# Altium PCB Sky_PCB_1.PcbDoc
Units mm, origin at the board's own origin, x right, y up, seen from the top; angles counter-clockwise.
Board outline 119.04 x 79.87 mm, 2 copper layers (Top Layer, Bottom Layer); 22 components, 19 nets, 98 pads, 0 vias.
Unrouted connection lines stored in the file: 2.
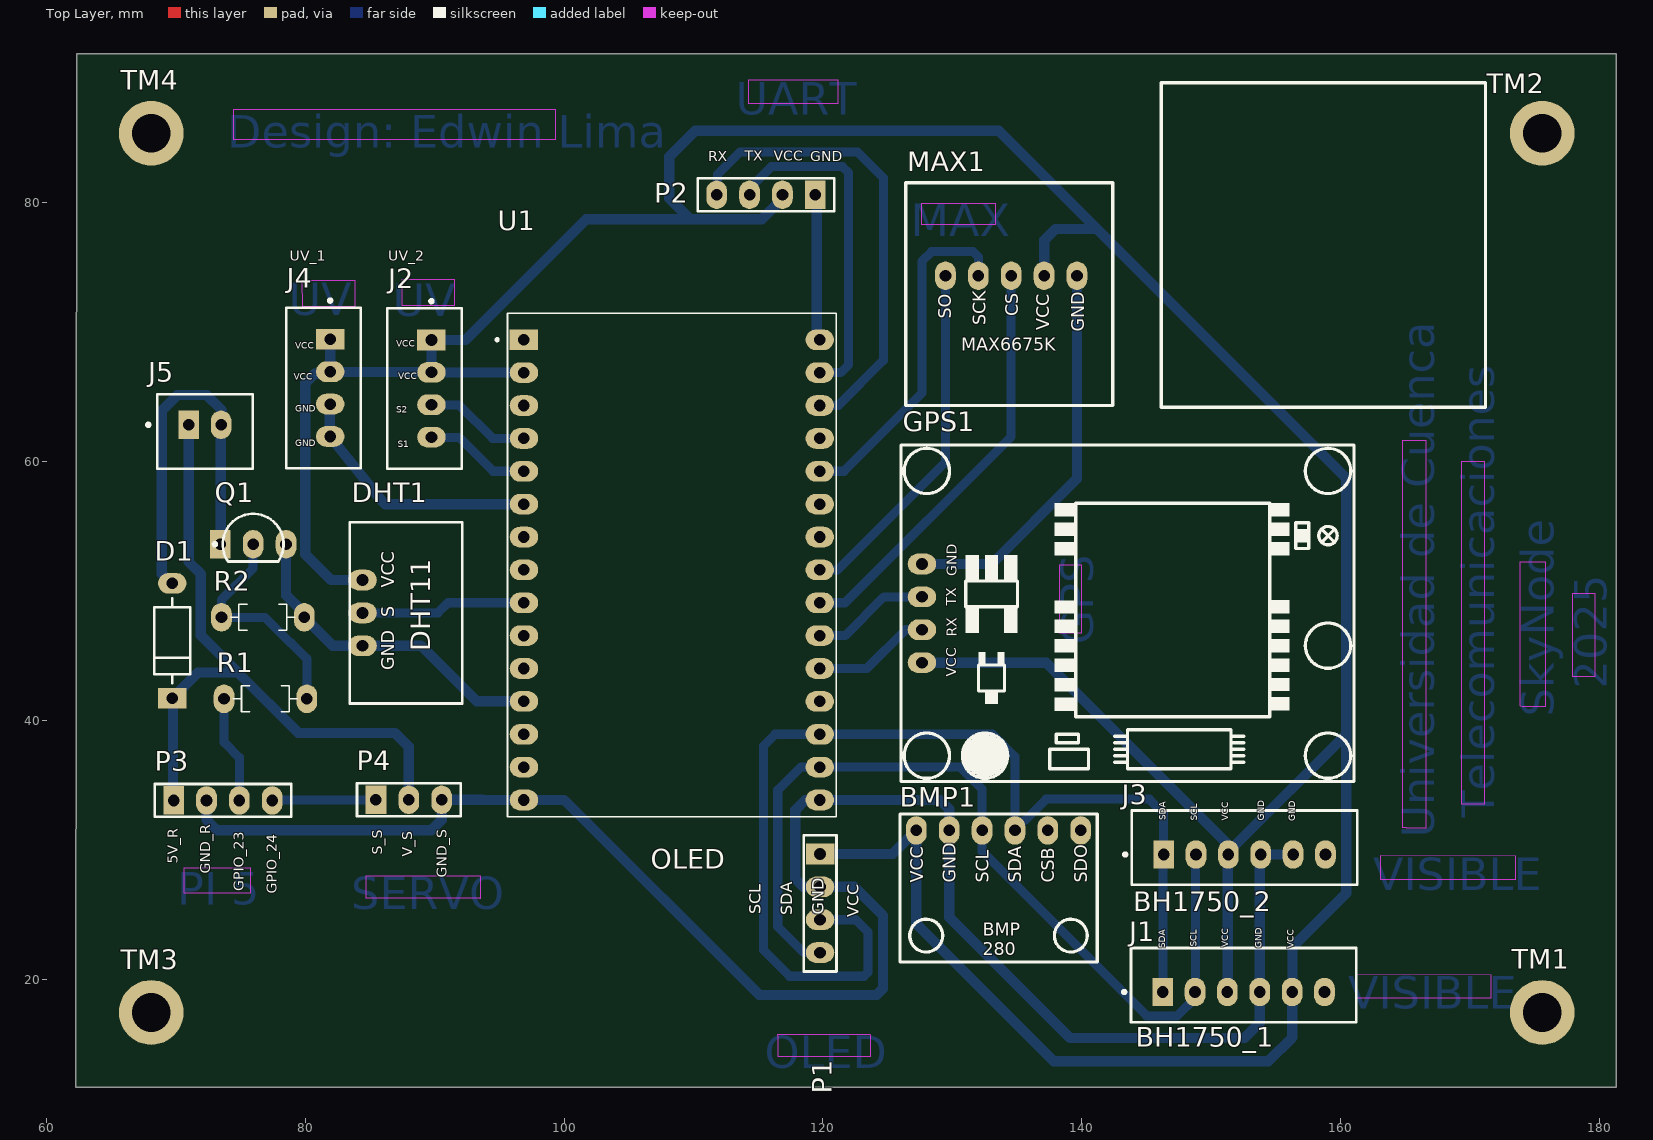
[diagram p0: Top Layer view]
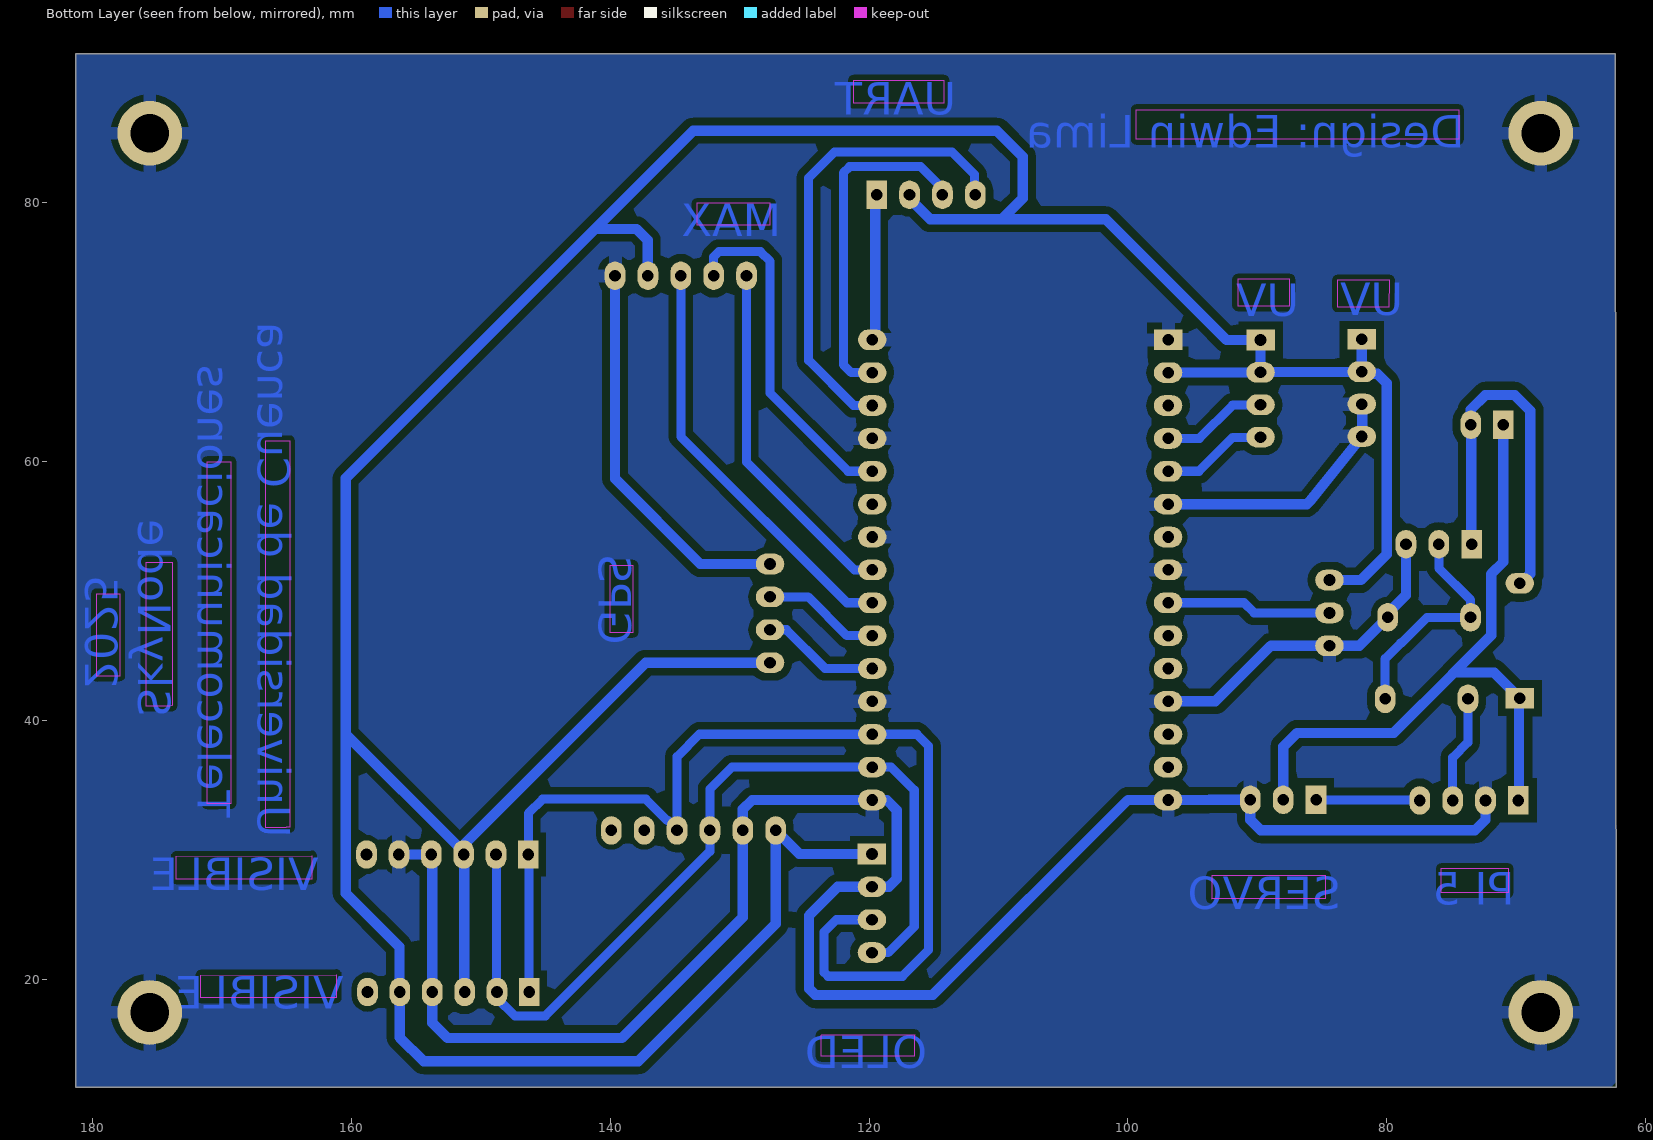
[diagram p1: Bottom Layer view, seen from below]
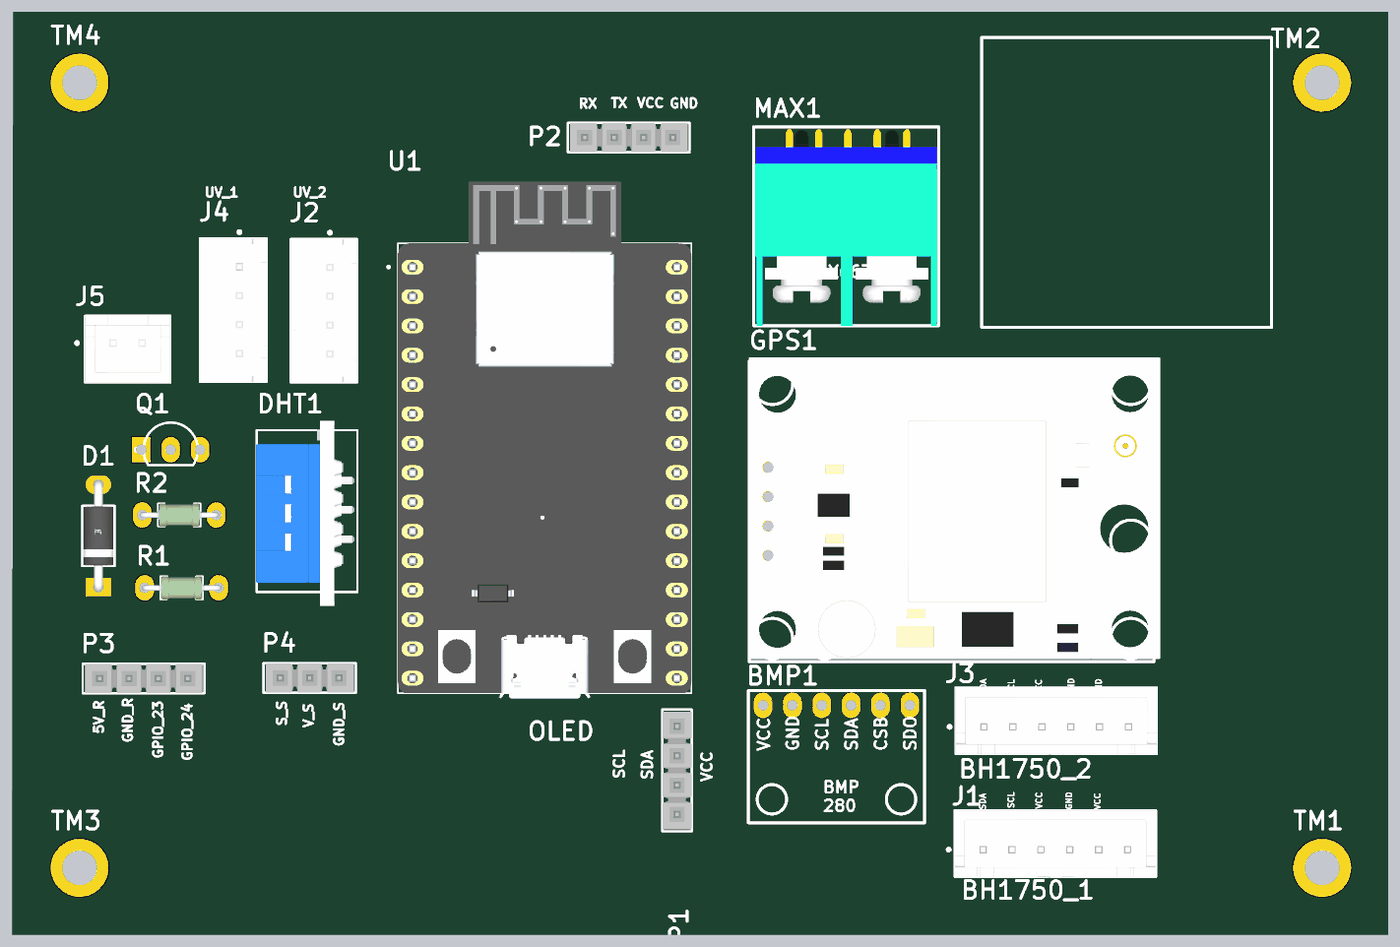
[diagram p2: 3D render of the assembled board from above, using the file's embedded part models]

## Layer stack, top to bottom
Top Solder: solder mask 0.0102, Solder Resist, Dk 3.5
Top Layer: signal copper 0.0356
Dielectric 1: dielectric 0.32, FR-4, Dk 4.8
Bottom Layer: signal copper 0.0356
Bottom Solder: solder mask 0.0102, Solder Resist, Dk 3.5

## Board outline
62.263,11.625 181.3,11.625 181.3,91.5 62.352,91.5

## Design rules (kind name [scope] priority, off if disabled: settings)
Clearance Clearance_1 [InNamedPolygon('PolygonSL') vs InNetClass('All Nets')] p1: gap=0.6 ignorepadtopadclearanceinfootprint=FALSE
Clearance [All] p2: gap=0.4 ignorepadtopadclearanceinfootprint=FALSE
Height [All] p1: minheight=0 maxheight=38.1 prefheight=12.7
PlaneClearance [All] p1: clearance=0.8
PlaneConnect [InNetClass('All Nets')] p1: planeconnectstyle=Relief reliefexpansion=0.5 reliefentries=4 reliefconductorwidth=0.8 reliefairgap=0.5
PolygonConnect [All] p1: connectstyle=Relief reliefconductorwidth=1 reliefentries=4 polygonreliefangle="90 Angle" airgapwidth=0.5
RoutingLayers [All] p1: top layer_v5=FALSE bottom layer_v5=TRUE
RoutingVias [All] p1: holewidth=0.711 width=1.27 viastyle="Through Hole" minholewidth=0.711 minwidth=1.27 maxholewidth=0.711 maxwidth=1.27
SolderMaskExpansion [All] p1: expansion=0.102 istentingtop=FALSE
SupplyNets "Schematic Supply Nets_1" [InNet('VCC')] p1: voltage=0.000
SupplyNets "Schematic Supply Nets" [InNet('GND')] p2: voltage=0.000
Width Width_1 [InNetClass('Signal')] p1: maxlimit=0.8 minlimit=0.7 preferedwidth=0.7
Width [InNetClass('POWER')] p2: maxlimit=1 minlimit=0.8 preferedwidth=0.8
26 further rules are at their usual default settings.

## Classes and differential pairs
net class Signal: 8511_1 8511_2 CS DHT GRX GTX NetP3_3 NetP3_4 NetQ1_2 RX SCK SCL SDA SO TX
net class POWER: GND VCC Ventilador+ Ventilador-
component class Externo: D1 J5 P3 P4 Q1 R1 R2
component class Sensores: BMP1 DHT1 GPS1 MAX1
component class Salida: J1 J2 J3 J4 P1 P2
component class Control: U1

## Components (designator, comment, footprint, x,y, rotation, side; value= is the part's Value field where it differs from the comment)
BMP1 "BMP280" BMP280 132.175,27.7 r90 top
D1 "1N4007" FP-1N4007-MFG 69.725,46.14 r90 top value=15pF
DHT1 "DHT11" DHT11 84.425,48.29 r90 top
GPS1 "GPS6MV2" GPS 127.061,47.033 r90 top
J1 "BH1750_1" FP-B6B-XH-A_LF_SN-MFG 152.5,19.525 r0 top
J2 "8511_1" FP-B4B-XH-A_LF_SN-MFG 89.225,65.625 r90 top
J3 "BH1750_2" FP-B6B-XH-A_LF_SN-MFG 152.575,30.15 r0 top
J4 "8511_2" FP-B4B-XH-A_LF_SN-MFG 81.4,65.675 r90 top
J5 "Ventilador" FP-B2B-XH-A_LF_SN-MFG 72.25,62.3 r0 top
MAX1 "MAX6675" MAX6675 134.1,73.825 r0 top
P1 "OLED" SMTC-TSW-104-08-X-S 119.775,29.665 r270 top
P2 "UART" SMTC-TSW-104-08-X-S 119.412,80.602 r180 top
P3 "Con_Rapberry" SMTC-TSW-104-08-X-S 69.83,33.8 r0 top
P4 "ServoMotor" SMTC-TSW-103-07-X-S 85.46,33.85 r0 top
Q1 "P2N2222AG" ONSC-TO-92-3-29-11 75.975,53.6 r0 top
R1 "1k" RESAD640W45L370D200 76.925,41.65 r0 top
R2 "10k" RESAD640W45L370D200 76.725,47.95 r180 top
TM1 "Tornillo" "Tornillo M3"#1 175.575,17.425 r0 top
TM2 "Tornillo" "Tornillo M3"#2 155.575,85.35 r0 top
TM3 "Tornillo" "Tornillo M3"#1 68.1,17.425 r0 top
TM4 "Tornillo" "Tornillo M3"#1 68.1,85.35 r0 top
U1 "ESP32-C3-DEVKITM-1" XCVR_ESP32-C3-DEVKITM-1 108.325,52 r0 top

## Footprints (in the part's own frame and the unit in brackets; to place one, negate y for a bottom-side part, rotate by r counter-clockwise, add the part's x,y. Pads: shape width x height; smd on the part's side, far side on the other; paste and mask are expansions set on the pad)
BMP280 [mm]
  oval 2.2x1.6 hole 0.9 paste-2539.97 mask+0.051: 1(3.787,4.959) 2(3.787,2.419) 3(3.787,-0.121) 4(3.787,-2.661) 5(3.787,-5.201) 6(3.787,-7.741)
  silkscreen extent -6.37,-9.01 5.06,6.23, body extent -6.3,-9 5.2,5.8, height 5.3
DHT11 [mm]
  oval 1.6x2.2 hole 0.9 paste-2539.97 mask+0: 1(-2.54,0) 2(0,0) 3(2.54,0)
  silkscreen extent -7,-7.7 7,1, body extent -8.2,-7.45 7.8,1.05, height 25.09
FP-1N4007-MFG [mm]
  rect 1.6x2.2 hole 0.9 paste-2539.97 mask+0: 1(-4.44,0)
  oval 1.6x2.2 hole 0.9 paste-2539.97 mask+0: 2(4.44,0)
  silkscreen extent -3.27,-1.4 3.26,1.4, body extent -5.32,-1.5 5.32,1.5, height 0.25
FP-B2B-XH-A_LF_SN-MFG [mm]
  rect 1.6x2.2 hole 0.9 paste-2539.97 mask+0: 1(-1.25,0.525)
  oval 1.6x2.2 hole 0.9 paste-2539.97 mask+0: 2(1.25,0.525)
  silkscreen extent -4.5,-2.88 3.7,2.87, body extent -3.8,-2.98 3.8,2.98, height 0.25
FP-B4B-XH-A_LF_SN-MFG [mm]
  rect 1.6x2.2 hole 0.9 paste-2539.97 mask+0: 1(3.75,-0.525)
  oval 1.6x2.2 hole 0.9 paste-2539.97 mask+0: 2(1.25,-0.525) 3(-1.25,-0.525) 4(-3.75,-0.525)
  silkscreen extent -6.2,-2.88 6.87,2.87, body extent -6.3,-2.98 6.3,2.98, height 0.25
FP-B6B-XH-A_LF_SN-MFG [mm]
  rect 1.6x2.2 hole 0.9 paste-2539.97 mask+0: 1(-6.25,-0.525)
  oval 1.6x2.2 hole 0.9 paste-2539.97 mask+0: 2(-3.75,-0.525) 3(-1.25,-0.525) 4(1.25,-0.525) 5(3.75,-0.525) 6(6.25,-0.525)
  silkscreen extent -9.35,-2.87 8.7,2.88, body extent -8.8,-2.98 8.8,2.98, height 0.25
GPS [mm]
  oval 1.6x2.2 hole 0.9 paste-2539.97 mask+0.254: 1(-2.583,-0.589) 2(-0.043,-0.589) 3(2.497,-0.589) 4(5.037,-0.589)
  silkscreen extent -11.77,-33.96 14.23,1.04, body extent -11.54,-34.5 14.54,1.1, height 4.33
MAX6675 [mm]
  oval 1.6x2.2 hole 0.9 paste-2539.97 mask+0.102: 1(-4.633,0.519) 2(-2.093,0.519) 3(0.447,0.519) 4(2.987,0.519) 5(5.527,0.519)
  silkscreen extent -7.7,-9.5 8.3,7.7, body extent -7.55,-9.5 8.15,7.5, height 32.39
ONSC-TO-92-3-29-11 [mm] "TO, 3-Leads, Body Dia 4.7mm, Pitch 1.27mm"
  rect 1.6x2.2 hole 0.9: 1(-2.54,0)
  oval 1.6x2.2 hole 0.9: 2(0,0) 3(2.54,0)
  silkscreen extent -3.07,-1.34 2.35,2.35, body extent -2.35,-1.33 2.36,2.36, height 7.87
RESAD640W45L370D200 [mm]
  oval 1.6x2.2 hole 0.9: 1(-3.2,0) 2(3.2,0)
  silkscreen extent -2.47,-1 2.47,1, body extent -3.42,-1 3.42,1, height 2
SMTC-TSW-103-07-X-S [mm] ".025 SQ Post Terminal Strip Assembly, 1x3 Pins, Vertical, 2.54mm Pitch, Male"
  rect 1.6x2.2 hole 0.9: 1(0,0)
  oval 1.6x2.2 hole 0.9: 2(2.54,0) 3(5.08,0)
  silkscreen extent -1.46,-1.27 6.54,1.27, body extent -1.27,-1.27 6.35,1.27, height 8.38
SMTC-TSW-104-08-X-S [mm] ".025 SQ Post Terminal Strip Assembly, 1x4 Pins, Vertical, 2.54mm Pitch, Male"
  rect 1.6x2.2 hole 0.9: 1(0,0)
  oval 1.6x2.2 hole 0.9: 2(2.54,0) 3(5.08,0) 4(7.62,0)
  silkscreen extent -1.46,-1.27 9.08,1.27, body extent -1.27,-1.27 8.89,1.27, height 8.38
"Tornillo M3"#1 [mm]
  round 5 hole 3: 1(0,0)
"Tornillo M3"#2 [mm]
  round 5 hole 3: 1(20,0)
XCVR_ESP32-C3-DEVKITM-1 [mm]
  rect 2.2x1.6 hole 0.9: 1(-11.43,17.395)
  oval 2.2x1.6 hole 0.9: 2(-11.43,14.855) 3(-11.43,12.315) 4(-11.43,9.775) 5(-11.43,7.235) 6(-11.43,4.695) 7(-11.43,2.155) 8(-11.43,-0.385) 9(-11.43,-2.925) 10(-11.43,-5.465) 11(-11.43,-8.005) 12(-11.43,-10.545) 13(-11.43,-13.085) 14(-11.43,-15.625) 15(-11.43,-18.165) 16(11.43,-18.165) 17(11.43,-15.625) 18(11.43,-13.085) 19(11.43,-10.545) 20(11.43,-8.005) 21(11.43,-5.465) 22(11.43,-2.925) 23(11.43,-0.385) 24(11.43,2.155) 25(11.43,4.695) 26(11.43,7.235) 27(11.43,9.775) 28(11.43,12.315) 29(11.43,14.855) 30(11.43,17.395)
  silkscreen extent -13.6,-19.45 12.7,19.46, body extent -12.7,-19.94 12.7,24.77, height 7.14

## Part data
D1: library part CMP-123542-000001-1, "Rectifier diode 1000 V 1 A DO-41, ,", Capacitance=15pF, Forward Current=1A, Manufacturer=Diotec, Max Junction Temp=+175°C, Max Repetitive Reverse Voltage=1000V, Max Surge Forward Current=27A, Peak Reverse Current=5uA, Temperature="-50°C to +175°C", Temperature Range Low=-50°C, Automotive=No, Category=Diode, ComponentLink2Description=Datasheet, ComponentLink2URL=https://datasheet.octopart.com/1N4007-Diotec-datasheet-62346875.pdf, Device Class L1="Discrete Semiconductors", Device Class L2=Diodes, Device Class L3="Rectifier Diodes", Height=2.8mm, Ipc Land Pattern Name=DIOAD888W100L520D280, Lead Free=Yes, Manufacturer Part Number=1N4007, Octopart=https://octopart.com/1n4007-diotec-4040411, Package=1N4007, Reverse Voltage=1000V, RoHS=TRUE, Temperature Range High=+175°C
J1 J3: library part CMP-17439-000076-1, "CONN HEADER VERT 6POS 2.5MM"
J2 J4: library part CMP-17439-000250-1, "CONN HEADER VERT 4POS 2.5MM", Color=Natural, Contact Resistance=20mR, Current Rating=3A, Flammability Rating="UL94 V-0", Housing Color=White, Insulation Resistance=1GR, Max Operating Temperature=85°C, Max Voltage Rating (AC)=250V, Min Operating Temperature=-25°C, Package Quantity=500, Connector Type=Header, Contact Finish - Mating=TIN, Contact Material=Brass, Contact Plating=Tin, Contact Shape=Square, Contact Type="Male Pin", Depth=5.75mm, Fastening Type=Detent, Gender=Male, Housing Material=Polyamide, Insulation Color=Natural, Insulation Material=Nylon, Lead Free="Lead Free", Lead Pitch=2.5mm, Length=12.4mm, Mated Stacking Heights=9.8mm, Material=Polyamide, Max Current Rating=3A, Max Voltage Rating (DC)=250V, Mount="Through Hole", Number of Contacts=4, Number of Positions=4, Number of Rows=1, Orientation=Straight, Packaging=Bulk, Pitch=2.5mm, REACH SVHC="No SVHC", Series=XH, Termination=Solder, Voltage Rating=250V, Voltage Rating (AC)=250V, Wire/Cable Gauge=22AWG
J5: library part CMP-2000-05888-3, "CONN HEADER VERT 2POS 2.5MM", Color=Natural, Contact Resistance=20mR, Current Rating=3A, Housing Color=White, Insulation Resistance=1GR, Max Operating Temperature=85°C, Max Voltage Rating (AC)=250V, Min Operating Temperature=-25°C, Connector Type="Male Pin", Contact Material=Brass, Contact Plating=Tin, Contact Type="Male Pin", Depth=5.75mm, Fastening Type=Detent, Housing Material=Polyamide, Lead Free="Lead Free", Lead Pitch=2.5mm, Length=7.4mm, Max Current Rating=3A, Max Voltage Rating (DC)=250V, Mount="Through Hole", Number of Contacts=2, Number of Positions=2, Number of Rows=1, Orientation=Straight, Packaging=Bulk, Pitch=2.5mm, REACH SVHC="No SVHC", Series=XH, Termination=Solder, Voltage Rating=250V, Voltage Rating (AC)=250V, Wire/Cable Gauge=22AWG
P1 P2 P3: library part CMP-1024-00357-1, "0.025\" SQ Post Header, Through-hole, Vertical, -55 to 125 degC, 2.54 mm Pitch, 4-Pin, Male, RoHS", Manufacturer=Samtec, PartNumber=TSW-104-08-G-S, Temperature Range="-55 to 125 degC", ComponentLink1Description="Manufacturer URL", ComponentLink1URL=http://www.samtec.com, ComponentLink2Description=Datasheet, ComponentLink2URL=http://www.samtec.com/documents/webfiles/pdf/TSW_TH.PDF, ComponentLink3Description="Package Specification", ComponentLink3URL=http://www.samtec.com/documents/webfiles/cpdf/TSW-XXX-XX-XXX-X-XX-XXX-MKT.pdf, DatasheetVersion=F-214, Mounting Technology=Through-hole, Orientation=Vertical, PackageDescription=".025[0.64] SQ. Post Terminal Strip Assembly", PackageReference=TSW-104-08-X-S, PackageVersion="DM, 8/1988", Pitch="2.54 mm", RoHS=True
P4: library part CMP-1024-00332-1, "0.025\" SQ Post Header, Through-hole, Vertical, -55 to 105 degC, 2.54 mm Pitch, 3-Pin, Male, RoHS", Manufacturer=Samtec, PartNumber=TSW-103-07-T-S, Temperature Range="-55 to 105 degC", ComponentLink1Description="Manufacturer URL", ComponentLink1URL=http://www.samtec.com, ComponentLink2Description=Datasheet, ComponentLink2URL=http://www.samtec.com/documents/webfiles/pdf/TSW_TH.PDF, ComponentLink3Description="Package Specification", ComponentLink3URL=http://www.samtec.com/documents/webfiles/cpdf/TSW-XXX-XX-XXX-X-XX-XXX-MKT.pdf, DatasheetVersion=F-214, Mounting Technology=Through-hole, Orientation=Vertical, PackageDescription=".025[0.64] SQ. Post Terminal Strip Assembly", PackageReference=TSW-103-07-X-S, PackageVersion="DM, 8/1988", Pitch="2.54 mm", RoHS=True
Q1: library part CMP-1048-01402-1, "Amplifier Transistor, NPN Silicon, 3-Pin TO-92, Pb-Free, Bulk Box", Manufacturer="On Semiconductor", ComponentLink1Description="Manufacturer URL", ComponentLink1URL=http://www.onsemi.com/, ComponentLink2Description=Datasheet, ComponentLink2URL=http://www.onsemi.com/pub_link/Collateral/P2N2222A-D.PDF, ComponentLink3Description="Package Specification", ComponentLink3URL=http://www.onsemi.cn/pub_link/Collateral/2N6426-D.PDF, DatasheetVersion="Rev. 7", fT Min (MHz)=300, IC Continuous (A)=0.6, Mounting Technology="Through Hole", PackageDescription="3-Pin Transistor Outline, Body 4.825 x 3.685 mm, Pitch 1.27 mm", PackageReference=TO-92-3-29-11_AM_SL, PackageVersion="Rev. AM", Packing="Bulk Box", PartNumber=P2N2222AG, Polarity=NPN, RoHS=TRUE
R1 R2: library part LR0204F2K4, "2.4 kOhms Â±1% 0.25W, 1/4W Through Hole Resistor Axial - Metal Film", Package="Axial TE Connectivity Passive Product", Check_prices=https://www.snapeda.com/parts/LR0204F2K4/TE/view-part/?ref=eda, MF="TE Connectivity Passive Product", MP=LR0204F2K4, SnapEDA_Link=https://www.snapeda.com/parts/LR0204F2K4/TE/view-part/?ref=snap
U1: "WiFi Development Tools (802.11) (ENGINEERING SAMPLE ONLY) ESP32-C3 General-Purpose Dev Board, Embeds ESP32-C3-MINI-1, 4 MB Flash, w/ Pin Header", Package=None, Check_prices=https://www.snapeda.com/parts/ESP32-C3-DEVKITM-1/Espressif+Systems/view-part/?ref=eda, MF="Espressif Systems", MP=ESP32-C3-DEVKITM-1, SnapEDA_Link=https://www.snapeda.com/parts/ESP32-C3-DEVKITM-1/Espressif+Systems/view-part/?ref=snap

## Nets (pads, with @x,y where several pads share a name; then routed paths per layer and width w, separated by ;. In a path a pad name is that pad's centre, name@x,y a point inside that pad or via, vN(x,y) a via of type N, cw(c..) or ccw(c..) an arc to the next point about the centre after c; other vN are vias at no path point)
8511_1: J2.4 U1.5 | length 8.2
  Bottom Layer w0.7: J2.4 89.773,61.852 91.9,61.852 94.517,59.235 U1.5
8511_2: J2.3 U1.4 | length 8.2
  Bottom Layer w0.7: J2.3 89.773,64.352 91.9,64.352 94.477,61.775 U1.4
CS: MAX1.2 U1.26 | length 26.9
  Bottom Layer w0.7: U1.26 121.615,59.235 127.648,65.268 127.648,75.451 128.397,76.2 131.601,76.2 132.007,75.794 MAX1.2
DHT: DHT1.2 U1.9 | length 12.8
  Bottom Layer w0.7: DHT1.2 90.246,48.29 91.031,49.075 U1.9
GND: BMP1.2 DHT1.1 GPS1.4 J1.4 J3.4 J3.5 J4.3 J4.4 MAX1.5 P1.2 P2.1 P3.2 P4.3 Q1.3 R2.1 TM1.1 TM2.1 TM3.1 TM4.1 U1.1 U1.6 U1.8 U1.12 U1.15 U1.16 U1.19 U1.24 U1.27 U1.30 | length 233.6
  Bottom Layer w0.8: P3.2 72.37,32.309 73.183,31.496 89.727,31.496 90.54,32.309 P4.3 93.701,33.85 93.716,33.835 U1.15 99.998,33.835 115.062,18.771 124.155,18.771 124.638,19.253 124.638,24.915 122.428,27.125 P1.2 118.466,27.125 117.856,27.735 117.856,33.059 118.632,33.835 U1.16 129.043,33.835 129.756,33.122 BMP1.2 129.756,24.778 139.09,15.443 152.562,15.443 153.75,16.631 J1.4 153.75,29.55 J3.4 J3.5 ; Q1.3 78.515,49.66 79.925,48.25 R2.1 82.125,45.75 DHT1.1 88.948,45.75 93.243,41.455 U1.12 ; J4.4@81.9,61.9 82.195,61.605 85.916,56.96 85.947,56.929 86.181,56.695 U1.6 ; J4.4@81.9,61.95 J4.3@81.9,64.4 ; P2.1 119.535,80.48 119.535,69.615 U1.30 ; GPS1.4 133.049,52.07 139.627,58.649 MAX1.5
GRX: GPS1.3 U1.21 | length 9.1
  Bottom Layer w0.7: U1.21 121.717,46.535 124.712,49.53 GPS1.3
GTX: GPS1.2 U1.20 | length 9.1
  Bottom Layer w0.7: U1.20 123.393,43.995 126.388,46.99 GPS1.2
NetP3_3: P3.3 R1.1 | length 8.3
  Bottom Layer w0.7: R1.1 73.725,38.294 74.91,37.109 P3.3
NetP3_4: P3.4 P4.1 | length 8.1
  Bottom Layer w0.7: P3.4 77.45,33.85 P4.1
NetQ1_2: Q1.2 R1.2 R2.2 | length 17.7
  Bottom Layer w0.7: Q1.2 75.975,51.74 73.525,49.29 R2.2 76.875,47.95 78.875,45.95 78.925,45.95 80.125,44.75 R1.2
RX: P2.4 U1.28 | length 36.4
  Bottom Layer w0.7: P2.4 111.842,80.652 111.842,82.15 113.589,83.896 122.679,83.896 124.676,81.9 124.676,67.798 121.193,64.315 U1.28
SCK: MAX1.3 U1.22 | length 32.5
  Bottom Layer w0.7: U1.22 121.704,49.075 134.547,61.918 MAX1.3
SCL: BMP1.3 J1.2 J3.2 P1.4 U1.17 | length 70.1
  Bottom Layer w0.7: P1.4 118.524,22.045 116.51,24.059 116.51,34.595 118.29,36.375 U1.17 130.6,36.375 132.296,34.679 BMP1.3 132.296,29.87 145.016,17.15 147.361,17.15 148.75,18.539 J1.2 148.788,19.037 148.788,29.587 J3.2
SDA: BMP1.4 J1.1 J3.1 P1.3 U1.18 | length 85
  Bottom Layer w0.7: P1.3 122.53,24.585 123.472,23.643 123.472,20.523 123.167,20.218 117.424,20.218 115.392,22.25 115.392,37.998 116.309,38.915 133.115,38.915 134.836,37.194 BMP1.4 134.836,31.543 135.53,32.237 135.586,32.237 137.246,33.897 145.224,33.897 146.325,32.796 J3.1 146.287,29.587 146.287,19.037 J1.1
SO: MAX1.1 U1.23 | length 27.6
  Bottom Layer w0.7: U1.23 121.135,51.615 129.467,59.947 MAX1.1
TX: P2.3 U1.29 | length 26.4
  Bottom Layer w0.7: P2.3 114.333,81.102 116.009,82.779 121.504,82.779 121.987,82.296 121.987,67.471 121.371,66.855 U1.29
VCC: BMP1.1 DHT1.3 GPS1.1 J1.3 J1.5 J2.1 J2.2 J3.3 J4.1 J4.2 MAX1.4 P1.1 P2.2 U1.2 U1.3 | length 296.8
  Bottom Layer w0.8: J4.1 J4.2 ; DHT1.3 82.017,50.83 80.01,52.837 80.01,66.04 80.742,66.772 81.772,66.772 J4.2 ; U1.2 96.885,66.865 89.76,66.865 J2.2 ; P2.2 116.873,80.302 115.273,78.702 109.74,78.702 ; P1.1 125.394,29.665 BMP1.1 127.216,24.259 137.825,13.65 154.417,13.65 156.25,15.483 J1.5 ; GPS1.1 137.262,44.45 J3.3@151.325,30.387 ; MAX1.4 137.087,77.073 137.973,77.959 141.166,77.959 ; J1.3 151.288,19.037 151.288,29.588 J3.3 ; J3.3@151.607,30.105 160.426,38.925 ; J1.5@156.282,19.032 156.282,22.5 160.426,26.645 160.426,38.925 ; J4.2 81.95,66.9 89.725,66.9 J2.2 ; J2.2 89.75,69.075 J2.1 92.375,69.375 101.702,78.702 109.74,78.702 ; 109.74,78.702 108.125,80.318 108.125,83.55 110.122,85.547 133.578,85.547 141.166,77.959 ; 141.166,77.959 160.426,58.699 160.426,38.925
Ventilador+: D1.1 J5.1 P3.1 P4.2 | length 54.3
  Bottom Layer w0.8: P3.1 69.777,33.852 69.777,41.647 D1.1 71.628,43.603 71.628,43.612 ; J5.1 71,52.225 71.925,51.3 71.925,46.575 74.9,43.6 ; 71.704,43.688 74.778,43.688 79.451,39.014 86.933,39.014 88,37.948 P4.2
Ventilador-: D1.2 J5.2 Q1.1 | length 29.7
  Bottom Layer w0.8: D1.2 69.641,50.58 68.9,51.321 68.9,63.925 70.1,65.125 72.383,65.125 73.5,64.008 J5.2 73.467,62.793 73.467,53.632 Q1.1
pads on no net: BMP1.5 BMP1.6 J1.6 J3.6 U1.7 U1.10 U1.11 U1.13 U1.14 U1.25

## Polygon pours and split planes (outlines as drawn)
GND on Bottom Layer "PolygonSL" (solid, pour order 0): 62.263,11.625 181.3,11.625 181.3,91.5 62.352,91.5

## Keep-outs
Keep-Out Layer:
  rectangle: 74.45,84.875 99.35,87.175
  rectangle: 114.225,87.675 121.2,89.45
  rectangle: 138.25,46.775 140,51.975
  rectangle: 70.625,26.675 75.775,28.55
  region: 84.725,28 93.525,28 93.525,26.225 93.5,26.25 84.725,26.25
  region: 161.175,20.35 161.175,18.55 171.625,18.55 171.625,20.3
  region: 163.075,29.525 163.075,27.725 173.525,27.725 173.525,29.475
  region: 177.9,49.763 177.9,43.413 179.625,43.413 179.65,43.388 179.675,43.413 179.675,49.763
  region: 174.025,41.087 175.85,41.087 175.85,52.212 173.85,52.212 173.85,41.137 173.875,41.113
  region: 170.3,33.537 171.15,33.537 171.15,59.988 169.3,59.988 169.3,33.563
  region: 165.025,31.712 165.05,31.688 166.625,31.688 166.625,61.587 164.775,61.587 164.775,31.712
  region: 127.625,78.293 127.625,79.925 133.3,79.925 133.3,78.293
  region: 116.5,15.6 116.5,14.025 123.7,14.025 123.7,15.65 123.65,15.7 116.475,15.7
  region: 87.487,74.075 91.512,74.075 91.512,72.025 87.512,72.025
  region: 79.787,74 83.812,74 83.812,71.95 79.812,71.95

## Other copper
Bottom Layer:
  text "UART" at 113.275,86.8 h2.52
  text "Design: Edwin Lima" at 73.975,84.25 h2.52
  text "MAX" at 126.8,77.4 h2.52
  text "UV" at 78.725,71.275 h2.52
  text "UV" at 86.775,71.225 h2.52
  text "GPS" at 140.875,45.825 h2.52 r90
  text "2025" at 180.55,42.445 h2.52 r90
  text "SkyNode" at 176.45,40.25 h2.52 r90
  text "Telecomunicaciones" at 171.875,32.475 h2.52 r90
  text "Universidad de Cuenca" at 167.25,30.925 h2.52 r90
  text "VISIBLE" at 162.525,26.85 h2.52
  text "PI 5" at 70.1,25.725 h2.52
  text "SERVO" at 83.55,25.4 h2.52
  text "VISIBLE" at 160.575,17.725 h2.52
  text "OLED" at 115.5,13.1 h2.52

## Silkscreen, mask and mechanical layers (free items; w line width, h text height)
Top Overlay:
  lines w0.254: 146.129,64.175 171.2,64.175 171.2,89.252 146.129,89.252 146.129,64.175
  text "VCC" at 116.2,83.225 h0.8
  text "TX" at 113.947,83.214 h0.8
  text "RX" at 111.15,83.175 h0.8
  text "GND" at 119.022,83.189 h0.8
  text "UV_1" at 78.8,75.483 h0.8
  text "UV_2" at 86.425,75.483 h0.8
  text "VCC" at 87.025,68.85 h0.5
  text "VCC" at 79.225,68.7 h0.5
  text "VCC" at 87.2,66.35 h0.5
  text "VCC" at 79.125,66.3 h0.5
  text "GND" at 79.225,63.85 h0.5
  text "S2" at 87.05,63.747 h0.5
  text "GND" at 79.209,61.171 h0.5
  text "S1" at 87.15,61.1 h0.5
  text "SDA" at 146.5,32.275 h0.5 r90
  text "SCL" at 148.925,32.25 h0.5 r90
  text "VCC" at 151.3,32.225 h0.5 r90
  text "GND" at 154.1,32.225 h0.5 r90
  text "GND" at 156.475,32.175 h0.5 r90
  text "S_S" at 85.967,29.6 h0.8 r90
  text "V_S" at 88.267,29.45 h0.8 r90
  text "5V_R" at 70.142,28.925 h0.8 r90
  text "OLED" at 106.704,28.529 h1.52
  text "GND_R" at 72.642,28.15 h0.8 r90
  text "GND_S" at 90.917,27.825 h0.8 r90
  text "GPIO_23" at 75.267,26.775 h0.8 r90
  text "GPIO_24" at 77.792,26.575 h0.8 r90
  text "BH1750_2" at 143.979,25.258 h1.52
  text "SCL" at 115.2,25.025 h0.9 r90
  text "GND" at 120.073,24.964 h0.9 r90
  text "SDA" at 117.623,24.939 h0.9 r90
  text "VCC" at 122.775,24.775 h0.9 r90
  text "SCL" at 148.9,22.5 h0.5 r90
  text "VCC" at 151.325,22.45 h0.5 r90
  text "SDA" at 146.45,22.375 h0.5 r90
  text "GND" at 153.916,22.379 h0.5 r90
  text "VCC" at 156.375,22.375 h0.5 r90
  text "BH1750_1" at 144.179,14.783 h1.52
Mechanical 1:
  the board outline again, w1.2

## Text inside footprints (layer, text, board x,y; h text height)
BMP1: Top Overlay "BMP / 280" at 132.334,21.843 h1; Top Overlay "VCC" at 127.754,27.423 h1 r90; Top Overlay "GND" at 130.256,27.423 h1 r90; Top Overlay "SCL" at 132.796,27.423 h1 r90; Top Overlay "SDA" at 135.336,27.423 h1 r90; Top Overlay "CSB" at 137.876,27.423 h1 r90; Top Overlay "SDO" at 140.416,27.423 h1 r90
DHT1: Top Overlay "GND" at 86.871,43.844 h1 r90; Top Overlay "S" at 86.871,47.944 h1 r90; Top Overlay "VCC" at 86.871,50.244 h1 r90
GPS1: Top Overlay "GND" at 130.32,51.136 h0.8 r90; Top Overlay "TX" at 130.3,48.835 h0.8 r90; Top Overlay "RX" at 130.35,46.435 h0.8 r90; Top Overlay "VCC" at 130.295,43.361 h0.8 r90
MAX1: Top Overlay "SO" at 129.897,71.028 h1 r90; Top Overlay "CS" at 135.097,71.228 h1 r90; Top Overlay "SCK" at 132.597,70.528 h1 r90; Top Overlay "VCC" at 137.497,70.128 h1 r90; Top Overlay "GND" at 140.197,70.028 h1 r90; Top Overlay "MAX6675K" at 130.703,68.528 h1